# Altium PCB PCB5.PcbDoc (part 1 of 2)
Units mm, origin at the board's own origin, x right, y up, seen from the top; angles counter-clockwise.
Board outline 200 x 100 mm, 2 copper layers (Top Layer, Bottom Layer); 155 components, 119 nets, 507 pads, 129 vias.
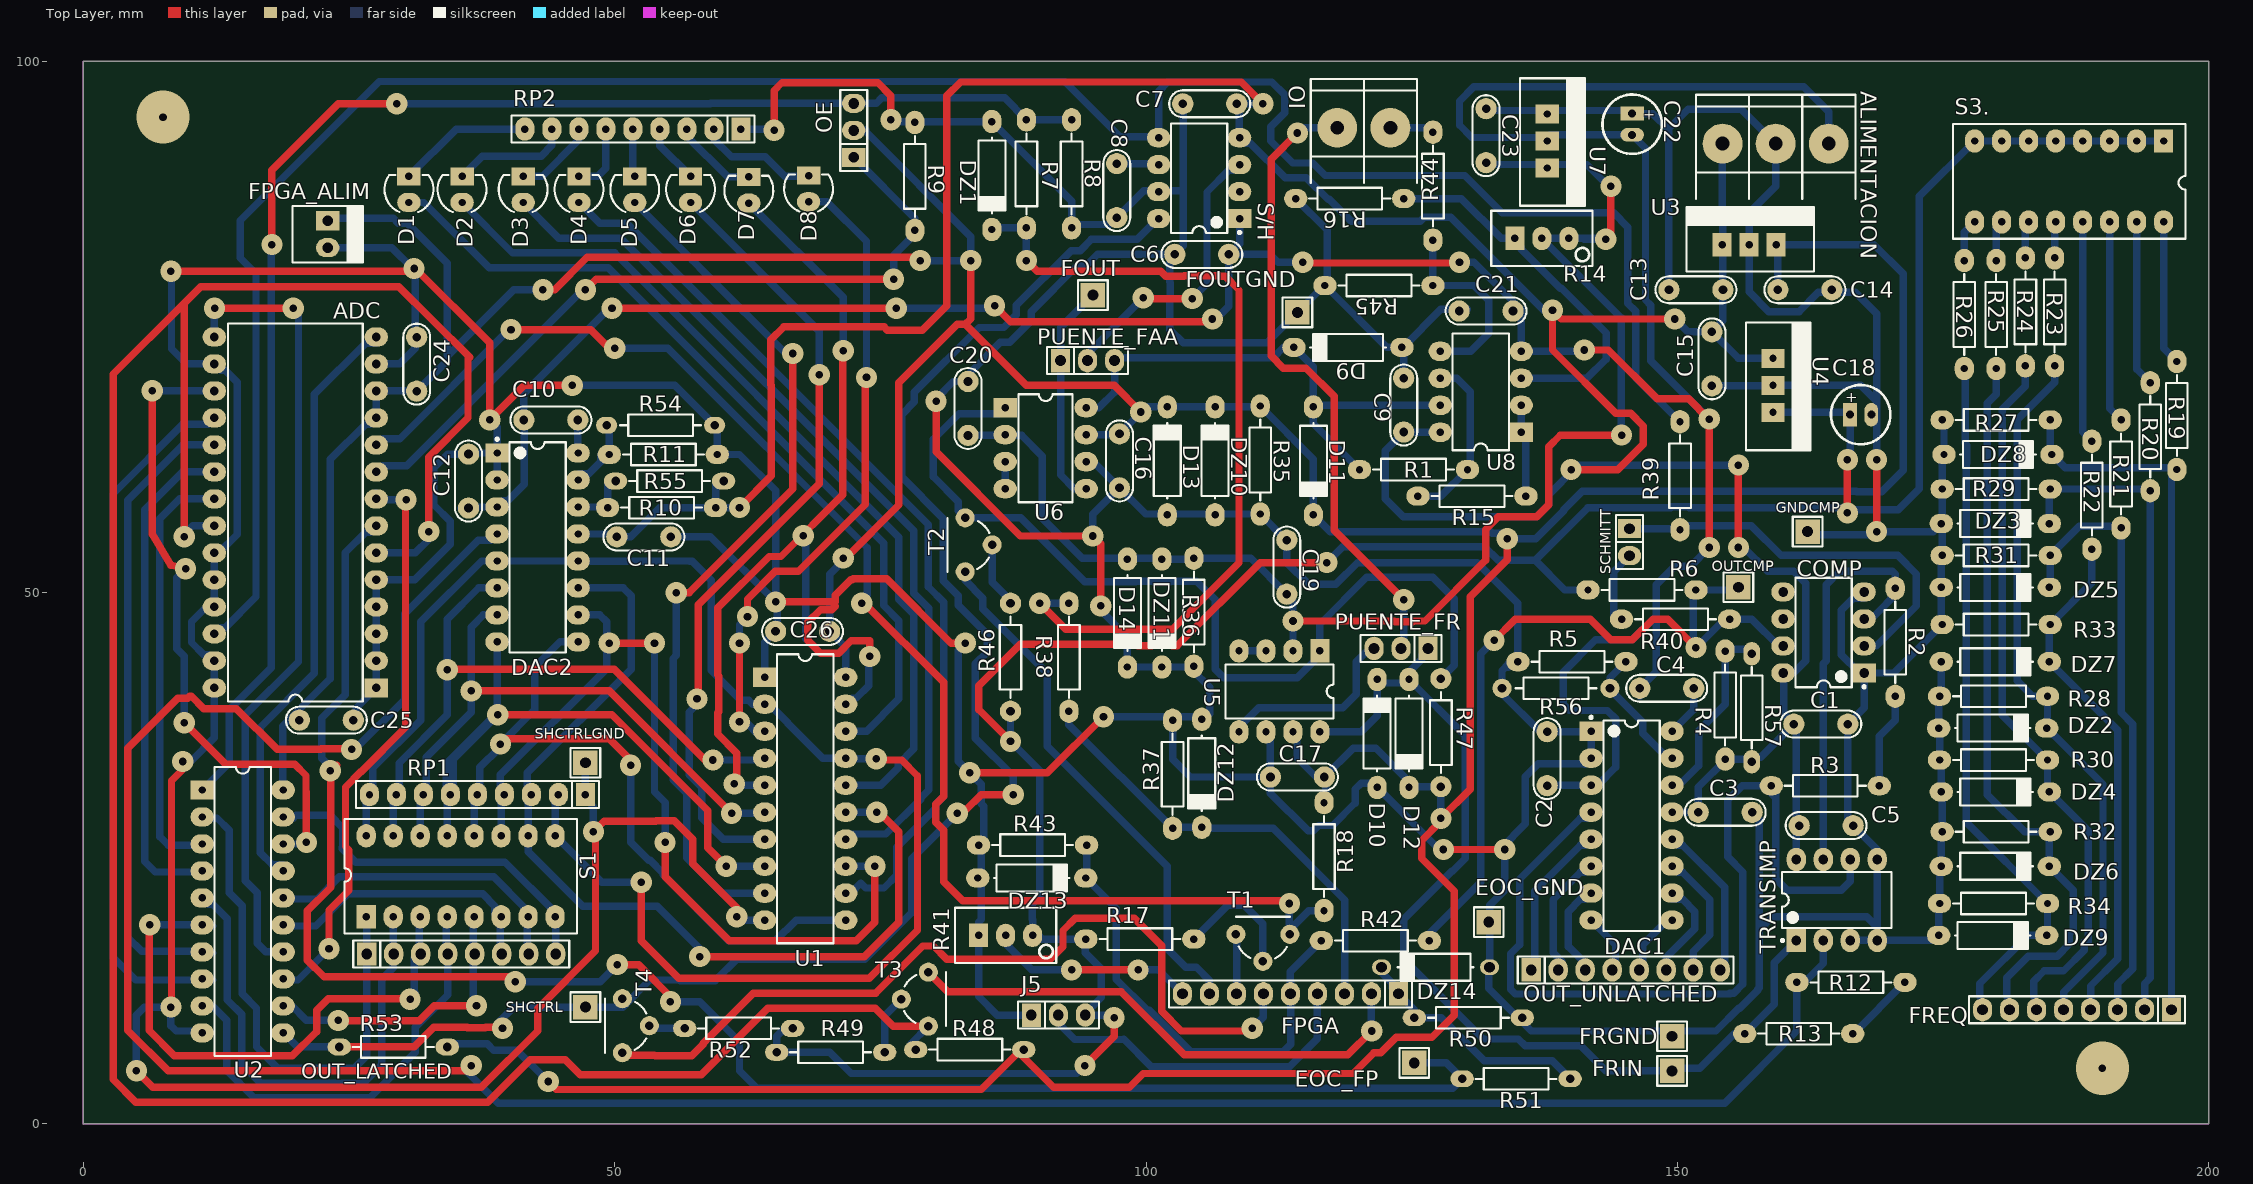
[diagram p0: Top Layer view]
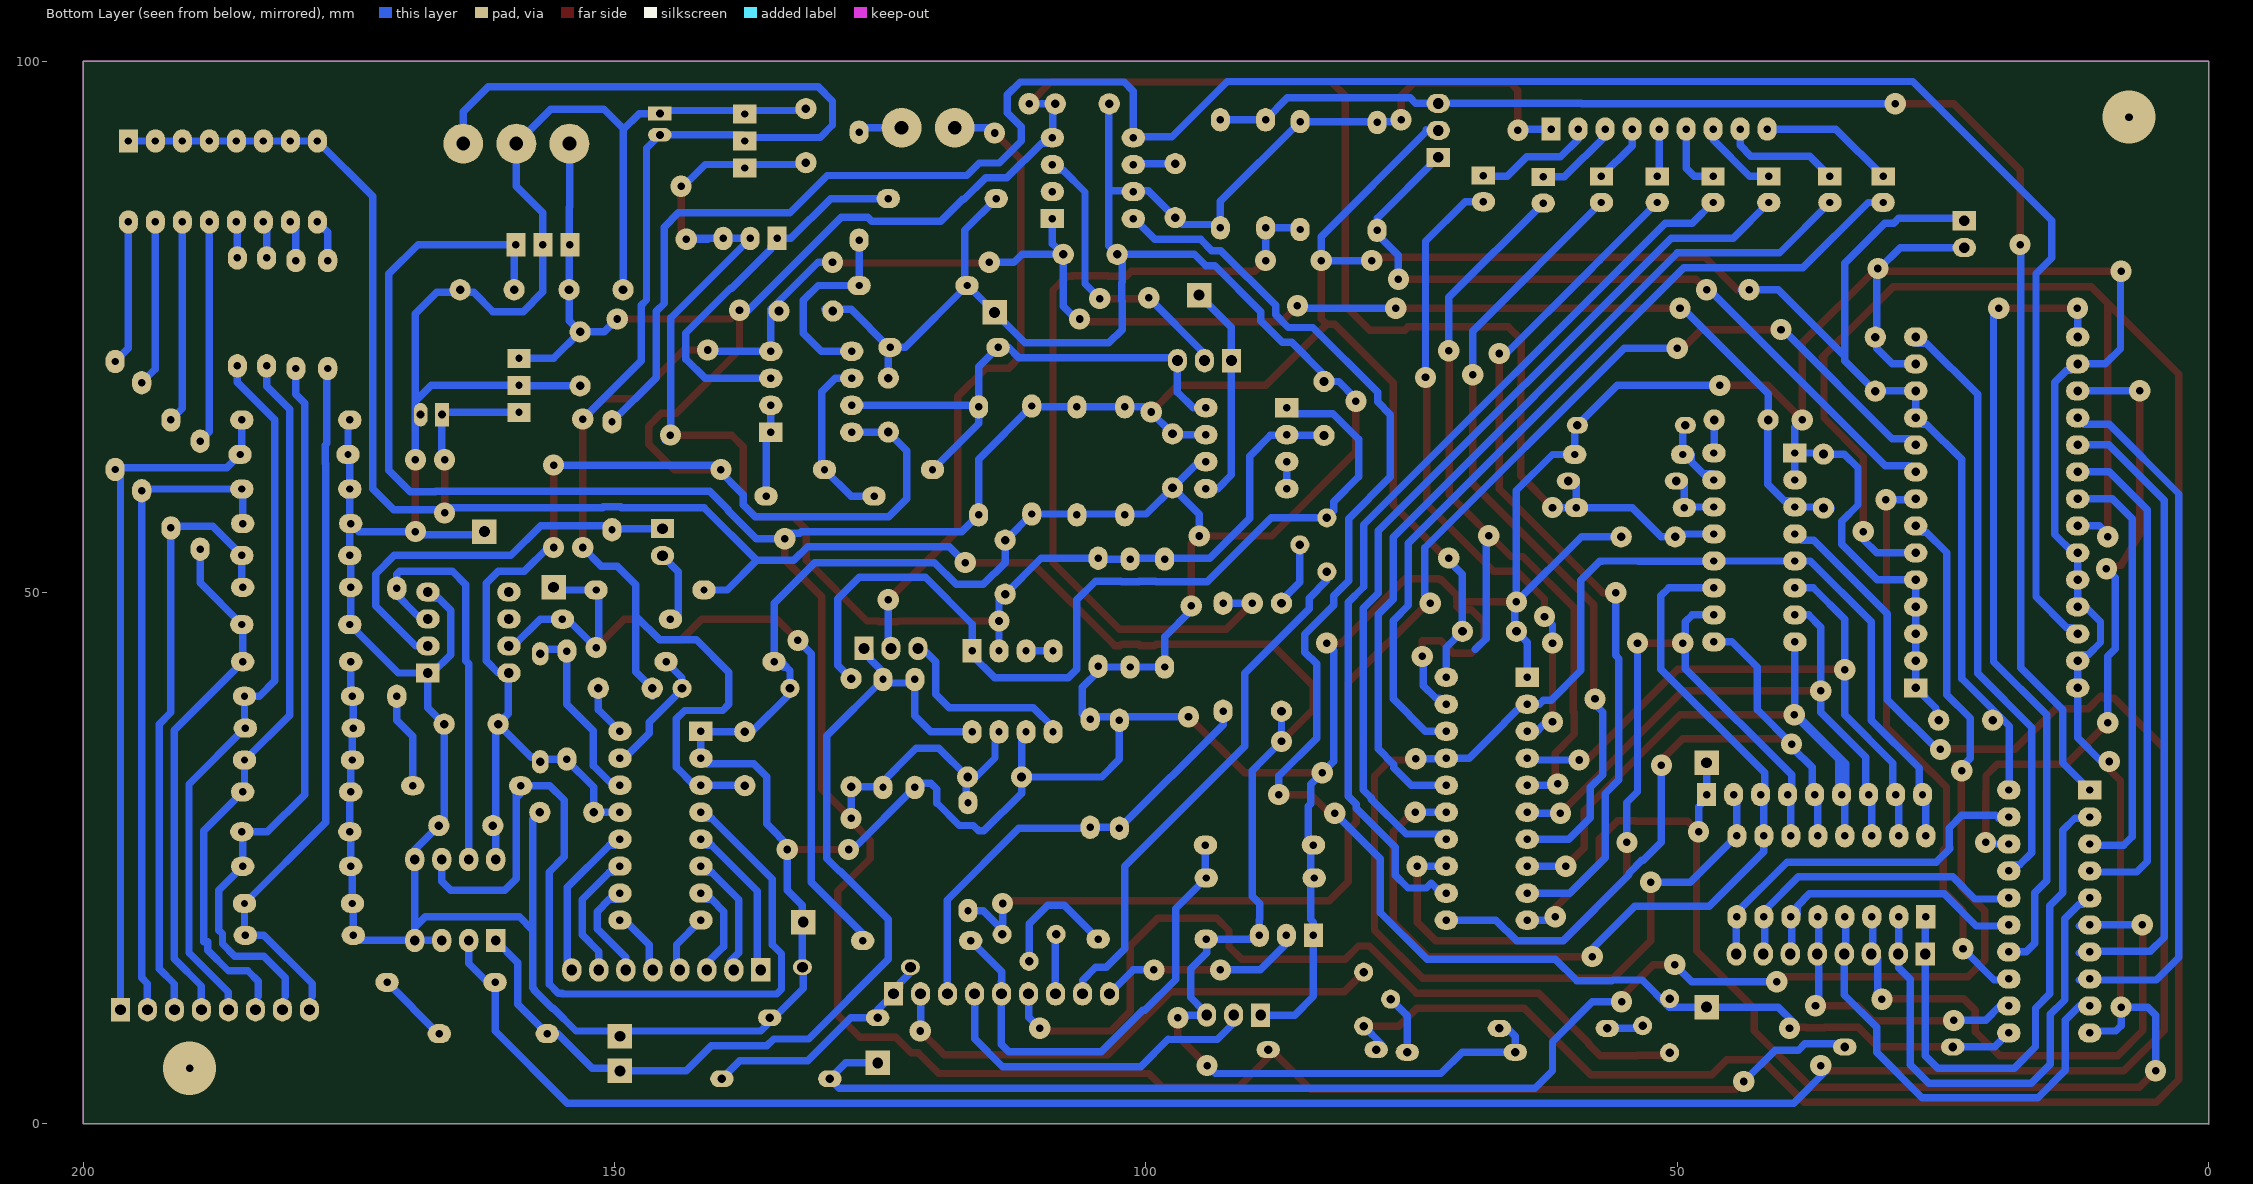
[diagram p1: Bottom Layer view, seen from below]

## Layer stack, top to bottom
Top Solder: solder mask 0.0102, Solder Resist, Dk 3.5
Top Layer: signal copper 0.0356
Dielectric 1: dielectric 0.32, FR-4, Dk 4.8
Bottom Layer: signal copper 0.0356
Bottom Solder: solder mask 0.0102, Solder Resist, Dk 3.5

## Board outline
0,0 0,100 200,100 200,0 0,0

## Design rules (kind name [scope] priority, off if disabled: settings)
Clearance [All] p1: gap=0.7
PolygonConnect [All] p1: connectstyle=Relief reliefconductorwidth=0.254 reliefentries=4 polygonreliefangle="90 Angle" airgapwidth=0.254
RoutingVias [All] p1: holewidth=0.7 width=1.8 viastyle="Through Hole" minholewidth=0.7 minwidth=1.8 maxholewidth=0.7 maxwidth=2
SolderMaskExpansion [All] p1: expansion=0.102
Width [All] p1: maxlimit=0.7 minlimit=0.7 preferedwidth=0.7
30 further rules are at their usual default settings.

## Components (designator, comment, footprint, x,y, rotation, side; value= is the part's Value field where it differs from the comment)
ADC "ADC0808CCN" DIP28 27.573,41.04 r180 top
ALIMENTACION "BORNERA 3" BORNERA3 159.25,92.25 r270 top
C1 "100n" CAP200 163.5,37.63 r0 top
C2 "100n" CAP200 137.75,34.38 r270 top
C3 "100n" CAP200 154.5,29.33 r180 top
C4 "10n" CAP200 149,41 r0 top
C5 "100n" CAP200 164,28.08 r0 top
C6 "100n" CAP200 105.25,81.83 r180 top
C7 "100n" CAP200 106,96 r180 top
C8 "10n" CAP200 97.25,87.83 r270 top
C9 "CAP" CAP200 124.25,67.65 r90 top
C10 "10n" CAP200 44,66.25 r180 top
C11 "100n" CAP200 52.75,55.25 r180 top
C12 "100n" CAP200 36.25,60.5 r270 top
C13 "330n" CAP200 151.75,78.5 r180 top
C14 "100n" CAP200 162,78.5 r0 top
C15 "100n" CAP200 153.25,72 r270 top
C16 "100n" CAP200 97.5,62.4 r270 top
C17 "100n" CAP200 114.25,32.65 r0 top
C18 "10u" CAP100RP 167.25,66.75 r0 top
C19 "100n" CAP200 113.25,52.4 r90 top
C20 "100n" CAP200 83.25,67.33 r90 top
C21 "CAP" CAP200 132,76.5 r180 top
C22 "2.2u" CAP100RP 145.75,94.08 r270 top
C23 "1u" CAP200 132,93 r90 top
C24 "100n" CAP200 31.373,71.5 r90 top
C25 "CAP" CAP200 22.873,38 r180 top
C26 "CAP" CAP200 67.683,46.357 r180 top
COMP "LM311N" N08E#1 163.76,46.25 r180 top
D1 "LED" LED3 30.643,87.933 r90 top
D2 "LED" LED3 35.643,87.933 r90 top
D3 "LED" LED3 41.393,87.933 r90 top
D4 "LED" LED3 46.643,87.933 r90 top
D5 "LED" LED3 51.893,87.933 r90 top
D6 "LED" LED3 57.143,87.933 r90 top
D7 "LED" LED3 62.623,87.873 r90 top
D8 "LED" LED3 68.25,88 r90 top
D9 "DIODO" DO41#1 119,73.08 r180 top
D10 "DIODO" DO41#1 121.75,36.75 r90 top
D11 "DIODO" DO41#1 115.75,62.4 r270 top
D12 "DIODO" DO41#1 124.75,36.75 r270 top
D13 "DIODO" DO41#1 102,62.4 r90 top
D14 "DIODO" DO41#1 98.25,48.08 r270 top
DAC1 "DAC0800LCN" N16E 145.69,28.07 r0 top
DAC2 "DAC0800LCN" N16E 42.75,54.25 r0 top
DZ1 "3.3V" DO41#1 85.5,89.25 r270 top
DZ2 "3.6V" DO41#1 179.67,37.25 r0 top
DZ3 "3.6V" DO41#1 179.92,56.5 r0 top
DZ4 "3.6V" DO41#1 179.92,31.25 r0 top
DZ5 "3.6V" DO41#1 179.92,50.5 r0 top
DZ6 "3.6V" DO41#1 179.92,24.25 r0 top
DZ7 "3.6V" DO41#1 179.92,43.5 r0 top
DZ8 "3.6V" DO41#1 180.17,63 r0 top
DZ9 "3.6V" DO41#1 179.67,17.75 r0 top
DZ10 "5.6V" DO41#1 106.5,62.4 r90 top
DZ11 "5.6V" DO41#1 101.5,48.08 r270 top
DZ12 "3.6V" DO41#1 105.25,33 r270 top
DZ13 "3.6V" DO41#1 89.25,23.15 r0 top
DZ14 "DIODO ZENER" DO41#2 127.25,14.75 r180 top
EOC_FP "TP" TPTH 125.25,5.75 r0 top
EOC_GND "TP" TPTH 132.25,19 r0 top
FOUT "TP" TPTH 95,78 r0 top
FOUTGND "TP" TPTH 114.25,76.368 r0 top
FPGA "CON9" SIP9 123.75,12.25 r180 top
FPGA_ALIM "MOLEX2" MOLEX2 23,85 r270 top
FREQ "CON8" SIP8 196.5,10.75 r180 top
FRGND "TP" TPTH 149.5,8.25 r0 top
FRIN "TP" TPTH 149.5,5 r0 top
GNDCMP "GNDCMP" TPTH 162.25,55.75 r0 top
IO "BORNERA 2" BORNERA2 120.5,93.75 r270 top
J5 "SAR/MOD" JUMPER3 91.75,10.25 r0 top
OE "JUMPER" JUMPER3 72.5,93.5 r90 top
OUT_LATCHED "CON8" SIP8 26.673,16 r0 top
OUT_UNLATCHED "CON8" SIP8 136.25,14.5 r0 top
OUTCMP "TP" TPTH 155.75,50.5 r0 top
PUENTE_FAA "JUMPER" JUMPER3 94.5,71.83 r0 top
PUENTE_FR "JUMPER" JUMPER3 124,44.75 r180 top
R1 "4k7" RES400#1 130.25,61.58 r180 top
R2 "1K5" RES400#1 170.5,50.41 r270 top
R3 "1K" RES400#1 169,31.83 r180 top
R4 "10K" RES400#1 154.5,44.5 r270 top
R5 "10K" RES400#1 145.16,43.5 r180 top
R6 "1K" RES400#1 151.75,50.25 r180 top
R7 "560" RES400#1 88.75,84.33 r90 top
R8 "1K" RES400#1 93,84.33 r90 top
R9 "1K" RES400#1 78.25,94.25 r270 top
R10 "10K" RES400#1 59.5,58 r180 top
R11 "10K" RES400#1 59.66,63 r180 top
R12 "1K" RES400#1 161.25,13.33 r0 top
R13 "1k5" RES400#1 166.5,8.5 r180 top
R14 "10k" "PRESET V" 137.25,83.33 r0 top
R15 "4k7" RES400#1 135.75,59.08 r180 top
R16 "4k7" RES400#1 124.25,87.08 r180 top
R17 "2k2" RES400#1 104.5,17.4 r180 top
R18 "6k8" RES400#1 116.75,20.08 r90 top
R19 "10k" RES400#1 197,71.75 r270 top
R20 "10k" RES400#1 194.5,69.75 r270 top
R21 "10k" RES400#1 191.75,66.25 r270 top
R22 "10k" RES400#1 189,64.25 r270 top
R23 "10k" RES400#1 185.5,81.5 r270 top
R24 "10k" RES400#1 182.75,81.5 r270 top
R25 "10k" RES400#1 180,81.25 r270 top
R26 "10k" RES400#1 177,81.25 r270 top
R27 "22k" RES400#1 174.92,66.25 r0 top
R28 "22k" RES400#1 174.67,40.25 r0 top
R29 "22k" RES400#1 174.92,59.75 r0 top
R30 "22k" RES400#1 174.67,34.25 r0 top
R31 "22k" RES400#1 174.92,53.5 r0 top
R32 "22k" RES400#1 174.92,27.5 r0 top
R33 "22k" RES400#1 174.92,47 r0 top
R34 "22k" RES400#1 174.67,20.75 r0 top
R35 "10k" RES400#1 110.75,57.4 r90 top
R36 "10k" RES400#1 104.5,43.08 r90 top
R37 "20k" RES400#1 102.5,27.83 r90 top
R38 "10k" RES400#1 92.75,49 r270 top
R39 "TBD" RES400#1 150.25,66.08 r270 top
R40 "TBD" RES400#1 144.75,47.5 r0 top
R41 "PRESET" "PRESET V" 86.79,17.75 r0 top
R42 "10K" RES400#1 126.66,17.25 r180 top
R43 "20K" RES400#1 84.25,26.25 r0 top
R44 "4k7" RES400#1 127,93.33 r270 top
R45 "4k7" RES400#1 127,78.9 r180 top
R46 "2k2" RES400#2 87.25,49 r270 top
R47 "6k8" RES400#2 127.75,31.75 r90 top
R48 "6k8" RES400#3 88.5,7 r180 top
R49 "2k2" RES400#4 65.25,6.75 r0 top
R50 "RES" RES400#3 125.25,10 r0 top
R51 "560" RES400#3 129.75,4.25 r0 top
R52 "2K2" RES400#4 66.75,9 r180 top
R53 "6K8" RES400#3 34.25,7.25 r180 top
R54 "10K" RES400#5 59.41,65.75 r180 top
R55 "10K" RES400#3 60.25,60.5 r180 top
R56 "10K" RES400#6 143.66,41 r180 top
R57 "10K" RES400#3 157,44.25 r270 top
RP1 "R-PACK 8+1" RESNET8+1 47.25,31 r180 top
RP2 "R-PACK 8+1" RESNET8+1 61.873,93.623 r180 top
S1 "SW-DIP8" DIP-16-KEY 26.623,19.5 r0 top
S3. "SW-DIP8" DIP-16-KEY 195.75,92.5 r180 top
S/H "LF398N" N08E#2 105,89 r180 top
SCHMITT "JUMPER" JUMPER2 145.5,54.75 r270 top
SHCTRL "TP" TPTH 47.25,11 r0 top
SHCTRLGND "TP" TPTH 47.25,34 r90 top
T1 "TRANSISTOR NPN" TO92 111,16.58 r0 top
T2 "TRANSISTOR NPN" TO92 84.25,54.5 r90 top
T3 "TRANSISTOR NPN" TO92 78.25,11.75 r270 top
T4 "TRANSISTOR NPN" TO92 52,9.25 r90 top
TRANSIMP "LM358N" N08E#1 165,21.08 r90 top (schematic designator TRANSIMPEDANCIA)
U1 "SN74LS244N" 738-03 67.933,30.607 r270 top
U2 "MC74HC374N" 738-03 15,20 r270 top
U3 "7805" "TO-220 V" 156.75,82.75 r0 top
U4 "MC33269" "TO-220 V" 159,69.5 r270 top
U5 "MAX297CPA" DIP8 116.37,44.52 r270 top
U6 "MAX297CPA" DIP8 86.75,67.4 r0 top
U7 "7905" "TO-220 V" 137.75,92.5 r270 top
U8 "TL082ACJG" 693-02 131.5,68.9 r90 top

## Footprints (in the part's own frame and the unit in brackets; to place one, negate y for a bottom-side part, rotate by r counter-clockwise, add the part's x,y. Pads: shape width x height; smd on the part's side, far side on the other; paste and mask are expansions set on the pad)
693-02 [mm] "DIP; 8 Leads; Row Spacing 7.62 mm; Pitch 2.54 mm"
  rect 1.8x2.2 hole 0.7: 1(-3.81,-3.81)
  oval 1.8x2.2 hole 0.7: 2(-1.27,-3.81) 3(1.27,-3.81) 4(3.81,-3.81) 5(3.81,3.81) 6(1.27,3.81) 7(-1.27,3.81) 8(-3.81,3.81)
  silkscreen extent -5.5,-2.65 5.5,2.65
738-03 [mm] "DIP; 20 Leads; Row Spacing 7.62 mm; Pitch 2.54 mm"
  rect 1.8x2.2 hole 0.7: 1(-11.43,-3.81)
  oval 1.8x2.2 hole 0.7: 2(-8.89,-3.81) 3(-6.35,-3.81) 4(-3.81,-3.81) 5(-1.27,-3.81) 6(1.27,-3.81) 7(3.81,-3.81) 8(6.35,-3.81) 9(8.89,-3.81) 10(11.43,-3.81) 11(11.43,3.81) 12(8.89,3.81) 13(6.35,3.81) 14(3.81,3.81) 15(1.27,3.81) 16(-1.27,3.81) 17(-3.81,3.81) 18(-6.35,3.81) 19(-8.89,3.81) 20(-11.43,3.81)
  silkscreen extent -13.6,-2.65 13.6,2.65
BORNERA2 [mm] "Bornera con Tornillos 5mm separación"
  round 3.75 hole 1.3: 1(0,2.5) 2(0,-2.5)
  silkscreen extent -4.6,-5 5.2,5, body extent -3.76,-4.89 3.94,5.61, height 10
BORNERA3 [mm] "Bornera con Tornillos 5mm separación"
  round 3.75 hole 1.3: 1(0,5) 2(0,0) 3(0,-5)
  silkscreen extent -4.6,-7.5 5.2,7.5, body extent -3.76,-7.39 3.94,8.11, height 10.05
CAP100RP [mm] "Body diameter 5mm"
  rect 1.3x2.2 hole 0.762: 1(-1,0)
  oval 1.3x2.2 hole 0.762: 2(1,0)
  silkscreen extent -2.79,-2.79 2.79,2.79, body extent -2.53,-2.51 2.53,2.54, height 11.53
CAP200 [mm]
  round 2 hole 0.813: 1(-2.54,0) 2(2.54,0)
  silkscreen extent -3.81,-1.27 3.81,1.27, body extent -2.79,-1.17 2.79,1.12, height 6.24
DIP8 [mm]
  rect 2.2x1.8 hole 0.7: 1(0,0)
  oval 2.2x1.8 hole 0.7: 2(0,-2.54) 3(0,-5.08) 4(0,-7.62) 5(7.62,-7.62) 6(7.62,-5.08) 7(7.62,-2.54) 8(7.62,0)
  silkscreen extent 1.27,-8.89 6.35,1.27, body extent -0.06,-9.21 7.7,1.59, height 4.5
DIP28 [mm]
  rect 2.2x1.8 hole 0.813: 1(0,0)
  oval 2.2x1.8 hole 0.813: 2(0,-2.54) 3(0,-5.08) 4(0,-7.62) 5(0,-10.16) 6(0,-12.7) 7(0,-15.24) 8(0,-17.78) 9(0,-20.32) 10(0,-22.86) 11(0,-25.4) 12(0,-27.94) 13(0,-30.48) 14(0,-33.02) 15(15.24,-33.02) 16(15.24,-30.48) 17(15.24,-27.94) 18(15.24,-25.4) 19(15.24,-22.86) 20(15.24,-20.32) 21(15.24,-17.78) 22(15.24,-15.24) 23(15.24,-12.7) 24(15.24,-10.16) 25(15.24,-7.62) 26(15.24,-5.08) 27(15.24,-2.54) 28(15.24,0)
  silkscreen extent 1.27,-34.29 13.97,1.27, body extent -0.19,-34.54 15.43,1.47, height 4.66
DIP-16-KEY [mm] "DIP; 16 Leads; Row Spacing 7.62 mm; Pitch 2.54 mm"
  rect 1.8x2.2 hole 0.7: 1(0,0)
  oval 1.8x2.2 hole 0.7: 2(2.54,0) 3(5.08,0) 4(7.62,0) 5(10.16,0) 6(12.7,0) 7(15.24,0) 8(17.78,0) 9(17.78,7.62) 10(15.24,7.62) 11(12.7,7.62) 12(10.16,7.62) 13(7.62,7.62) 14(5.08,7.62) 15(2.54,7.62) 16(0,7.62)
  silkscreen extent -2.05,-1.59 19.83,9.2
DO41#1 [mm]
  oval 2.2x1.8 hole 0.7: 1(-5.08,0) 2(5.08,0)
  silkscreen extent -3.56,-1.27 3.56,1.27, body extent -5.46,-1.19 5.46,1.37, height 2.03
DO41#2 [mm]
  oval 1.8x1.5 hole 1.016: 1(-5.08,0) 2(5.08,0)
  silkscreen extent -3.56,-1.27 3.56,1.27, body extent -5.46,-1.19 5.46,1.37, height 2.03
JUMPER2 [mm]
  rect 1.8x2.2 hole 1.016: 1(-1.27,0)
  oval 1.8x2.2 hole 1.016: 2(1.27,0)
  silkscreen extent -2.54,-1.27 2.54,1.27, body extent -2.46,-1.27 2.54,1.27, height 9.5
JUMPER3 [mm]
  rect 1.8x2.2 hole 1.016: 1(-2.54,0)
  oval 1.8x2.2 hole 1.016: 2(0,0) 3(2.54,0)
  silkscreen extent -3.81,-1.27 3.81,1.27, body extent -3.81,-1.3 3.81,1.27, height 16.15
LED3 [mm]
  oval 1.8x2.2 hole 0.7: 1(-1.219,0)
  rect 1.7x2.2 hole 0.7: 2(1.245,0)
  silkscreen extent -2.13,-2.3 1.36,2.3, body extent -1.65,-1.63 1.65,1.66, height 0.49
MOLEX2 [mm]
  rect 1.8x2.2 hole 1.016: 1(0,0)
  oval 1.8x2.2 hole 1.016: 2(2.54,0)
  silkscreen extent -1.4,-3.3 3.94,3.3, body extent -1.27,-3.18 3.81,3.18, height 10.74
N08E#1 [mm] "DIP, 8-Leads, Row Spacing 7.62mm, Pitch 2.54mm, Body 9.91x6.35mm"
  rect 2.2x1.8 hole 0.9: 1(-3.81,3.81)
  oval 2.2x1.8 hole 0.9: 2(-3.81,1.27) 3(-3.81,-1.27) 4(-3.81,-3.81) 5(3.81,-3.81) 6(3.81,-1.27) 7(3.81,1.27) 8(3.81,3.81)
  silkscreen extent -3.94,-5.15 2.65,5.23, body extent -3.6,-5.15 3.6,5.15, height 5.34
N08E#2 [mm] "DIP, 8-Leads, Row Spacing 7.62mm, Pitch 2.54mm, Body 9.91x6.35mm"
  rect 2.2x1.8 hole 0.7: 1(-3.81,3.81)
  oval 2.2x1.8 hole 0.7: 2(-3.81,1.27) 3(-3.81,-1.27) 4(-3.81,-3.81) 5(3.81,-3.81) 6(3.81,-1.27) 7(3.81,1.27) 8(3.81,3.81)
  silkscreen extent -3.94,-5.15 2.65,5.23, body extent -3.6,-5.15 3.6,5.15, height 5.34
N16E [mm] "DIP, 16-Leads, Row Spacing 7.62mm, Pitch 2.54mm, Body 19.3x6.35mm"
  rect 2.2x1.8 hole 0.7: 1(-3.81,8.89)
  oval 2.2x1.8 hole 0.7: 2(-3.81,6.35) 3(-3.81,3.81) 4(-3.81,1.27) 5(-3.81,-1.27) 6(-3.81,-3.81) 7(-3.81,-6.35) 8(-3.81,-8.89) 9(3.81,-8.89) 10(3.81,-6.35) 11(3.81,-3.81) 12(3.81,-1.27) 13(3.81,1.27) 14(3.81,3.81) 15(3.81,6.35) 16(3.81,8.89)
  silkscreen extent -3.93,-9.9 2.65,10.31, body extent -3.3,-9.9 3.3,9.9, height 4.32
"PRESET V" [mm]
  rect 1.8x2.2 hole 0.7: 1(-2.54,0)
  oval 1.8x2.2 hole 0.7: 2(0,0) 3(2.54,0)
  silkscreen extent -4.76,-2.6 4.76,2.6, body extent -4.7,-2.42 4.83,2.42, height 11.55
RES400#1 [mm]
  oval 2.2x1.8 hole 0.7: 1(0,0) 2(10.16,0)
  silkscreen extent 1.27,-1.02 8.89,1.02, body extent -0.3,-1.14 10.46,1.17, height 2.43
RES400#2 [mm]
  round 2 hole 0.813: 1(0,0) 2(10.16,0)
  silkscreen extent 1.27,-1.02 8.89,1.02, body extent -0.3,-1.14 10.46,1.17, height 2.43
RES400#3 [mm]
  oval 2.2x1.575 hole 0.813: 1(0,0) 2(10.16,0)
  silkscreen extent 1.27,-1.02 8.89,1.02, body extent -0.3,-1.14 10.46,1.17, height 2.43
RES400#4 [mm]
  oval 2.2x1.6 hole 0.813: 1(0,0) 2(10.16,0)
  silkscreen extent 1.27,-1.02 8.89,1.02, body extent -0.3,-1.14 10.46,1.17, height 2.43
RES400#5 [mm]
  oval 2x1.575 hole 0.813: 1(0,0) 2(10.16,0)
  silkscreen extent 1.27,-1.02 8.89,1.02, body extent -0.3,-1.14 10.46,1.17, height 2.43
RES400#6 [mm]
  round 1.8 hole 0.813: 1(0,0) 2(10.16,0)
  silkscreen extent 1.27,-1.02 8.89,1.02, body extent -0.3,-1.14 10.46,1.17, height 2.43
RESNET8+1 [mm]
  rect 1.8x2.2 hole 0.7: 1(0,0)
  oval 1.8x2.2 hole 0.7: 2(2.54,0) 3(5.08,0) 4(7.62,0) 5(10.16,0) 6(12.7,0) 7(15.24,0) 8(17.78,0) 9(20.32,0)
  silkscreen extent -1.27,-1.27 21.59,1.27, body extent -1.09,-0.64 21.41,0.62, height 5.3
SIP8 [mm]
  rect 1.8x2.2 hole 1.016: 1(0,0)
  oval 1.8x2.2 hole 1.016: 2(2.54,0) 3(5.08,0) 4(7.62,0) 5(10.16,0) 6(12.7,0) 7(15.24,0) 8(17.78,0)
  silkscreen extent -1.27,-1.27 19.05,1.27, body extent -1.27,-1.27 19.05,1.27, height 8.38
SIP9 [mm]
  rect 1.8x2.2 hole 1.016: 1(0,0)
  oval 1.8x2.2 hole 1.016: 2(2.54,0) 3(5.08,0) 4(7.62,0) 5(10.16,0) 6(12.7,0) 7(15.24,0) 8(17.78,0) 9(20.32,0)
  silkscreen extent -1.27,-1.27 21.59,1.27, body extent -1.27,-1.3 21.59,1.24, height 8.38
TO92 [mm]
  round 1.8 hole 0.813: 1(0,-1.27) 2(2.54,1.27) 3(-2.54,1.27)
  silkscreen extent -2.54,-1 2.54,2.92, body extent -2.79,-1.55 2.79,2.79, height 8
"TO-220 V" [mm]
  rect 1.8x2.2 hole 0.7: 1(-2.54,0) 2(0,0) 3(2.54,0)
  silkscreen extent -5.9,-2.54 6.1,3.54, body extent -5,-2 5,3, height 18
TPTH [mm]
  rect 2.3x2.3 hole 1.016: 1(0,0)
  silkscreen extent -1.4,-1.4 1.4,1.4, body extent -1.27,-1.27 1.27,1.27, height 6.04

## Part data
ADC: "28 pin 8-bit Microprocessor Compatible A/D Converters With 8-Channel Multiplexer 13 per tube"
C1 C2 C3 C4 C5 C6 C7 C8 C10 C11 C12 C13 C14 C15 C16 C17 C19 C20 C23 C24: library part CAP
C18 C22: library part CAPPOL
COMP: "Voltage Comparator, 8-pin MDIP"
DAC1 DAC2: "8-Bit D/A Converter, 16-pin MDIP"
DZ1 DZ2 DZ3 DZ4 DZ5 DZ6 DZ7 DZ8 DZ9 DZ10 DZ11 DZ12 DZ13: library part "DIODO ZENER"
GNDCMP: library part TP
J5 OE PUENTE_FAA PUENTE_FR: library part JUMPER3
R1 R2 R3 R4 R5 R6 R7 R8 R9 R10 R11 R12 R13 R15 R16 R17 R18 R19 R20 R21 R22 R23 R24 R25 R26 R27 R28 R29 R30 R31 R32 R33 R34 R35 R36 R37 R38 R39 R40 R42 R43 R44 R45 R46 R47 R48 R49 R51 R52 R53 R54 R55 R56 R57: library part RES
R14: library part PRESET
S1 S3.: "4009 Series DIP Switch, Raised actuator"
S/H: "Monolithic Sample and Hold Circuits, 8-pin MDIP"
TRANSIMP: "Low Power Dual Operational Amplifier, 8-pin MDIP"
U1: "Octal Buffer/Line Driver with 3-State Outputs"
U2: "Octal 3-State Non-Inverting D-Type Flip-Flop"
U3 U4: library part 78XX, "REGULDOR POSITIVO"
U5 U6: "Active Filter Single SW-CAP Low Pass 8th Order 50kHz 8-Pin PDIP N"
U7: library part 79XX, "REGULADOR NEGATIVO"
U8: "JFET-Input Operational Amplifier"

## Via types
v1: diameter 2, hole 0.711, Top Layer to Bottom Layer, 127 vias
v2: diameter 5, hole 0.711, Top Layer to Bottom Layer, 2 vias

## Nets (pads, with @x,y where several pads share a name; then routed paths per layer and width w, separated by ;. In a path a pad name is that pad's centre, name@x,y a point inside that pad or via, vN(x,y) a via of type N, cw(c..) or ccw(c..) an arc to the next point about the centre after c; other vN are vias at no path point)
B0: DAC2.5 DAC2.12 RP1.2 RP1.9 S1.9 S1.16 U1.2 U1.17 | length 149.1
  Top Layer w0.7: v1(52.5,22.75) 52.5,17.25 56.05,13.7 73.95,13.7 78.5,18.25 78.5,32.75 77,34.25 74.75,34.25 v1(74.623,34.377)
  Bottom Layer w0.7: RP1.9@26.533,30.37 RP1.9@26.533,31 ; S1.16@26.623,27.12 26.623,30.93 27.25,31.557 27.25,33.5 31.75,38 31.75,47.25 37.48,52.98 DAC2.5@38.94,52.98 DAC2.12@46.56,52.98 46.59,52.95 53.682,52.95 53.712,52.98 57.034,52.98 57.064,52.95 57.3,52.95 59.073,51.177 59.073,42.677 61.866,39.884 62.599,39.884 62.986,39.497 U1.2@64.123,39.497 64.541,39.497 66.273,37.765 66.273,37.727 69.583,34.417 U1.17@71.743,34.417 71.783,34.377 v1(74.623,34.377) ; RP1.2@44.313,30.37 RP1.2@44.313,31 ; RP1.2@44.403,30.93 S1.9@44.403,27.12 48.773,22.75 v1(52.5,22.75)
B1: DAC2.11 RP1.3 S1.10 U1.15 | length 89.6
  Top Layer w0.7: v1(58,15.75) 73.5,15.75 76.75,19 76.75,27.5 74.913,29.337 v1(74.663,29.337)
  Bottom Layer w0.7: RP1.3@41.773,30.37 RP1.3@41.773,31 ; RP1.3@41.863,30.93 S1.10@41.863,27.12 41.863,25.637 47,20.5 54,20.5 58,16.5 v1(58,15.75) ; RP1.3@42.383,31 41.793,31 41.793,33.043 51.55,42.8 51.55,49.7 50.81,50.44 DAC2.11@46.56,50.44 ; U1.15@71.743,29.337 v1(74.663,29.337)
B2: DAC2.10 RP1.4 S1.11 U1.13 | length 85.7
  Top Layer w0.7: v1(49.5,45.25) 49.75,45 50,45.25 v1(53.75,45.25) ; v1(54.75,26.5) 54.75,23.25 60.773,17.227 72.751,17.227 74.493,18.969 v1(74.493,24.257)
  Bottom Layer w0.7: RP1.4@39.233,30.37 RP1.4@39.233,31 ; RP1.4@39.253,31 39.253,32.854 49.25,42.851 49.25,47.25 48.6,47.9 DAC2.10@46.56,47.9 ; S1.11@39.323,27.12 RP1.4@39.323,30.93 ; v1(53.75,45.25) 53.75,31.25 54.75,30.25 v1(54.75,26.5) ; U1.13@71.743,24.257 v1(74.493,24.257)
B3: DAC2.9 RP1.5 S1.12 U1.11 | length 70.5
  Top Layer w0.7: v1(39.25,35.75) 39.75,36.25 49.5,36.25 52,33.75 v1(51.5,33.75)
  Bottom Layer w0.7: RP1.5@36.693,30.37 RP1.5@36.693,31 ; RP1.5@36.713,31 37.303,31 37.303,33.553 v1@39.125,35.375 ; S1.12@36.783,27.12 RP1.5@36.783,30.93 ; v1(39.25,35.75) 42.5,39 42.5,43 44.86,45.36 DAC2.9@46.56,45.36 ; v1(51.5,33.75) 51.5,26.5 53.2,24.8 53.349,24.8 54.55,23.599 54.55,23.45 60.75,17.25 63.092,17.25 63.115,17.227 65.131,17.227 67.081,19.177 U1.11@71.743,19.177
B4: DAC2.8 RP1.6 S1.13 U1.8 | length 61.5
  Top Layer w0.7: v1(39,38.5) 49.75,38.5 58.75,29.5 58.75,26 v1(60.5,24.25)
  Bottom Layer w0.7: RP1.6@34.173,31 34.173,33.923 38.94,38.69 38.94,44.36 ; S1.13@34.243,27.12 RP1.6@34.243,30.93 ; RP1.6@34.8,31 34.8,34.3 v1(39,38.5) ; v1@60.507,24.257 U1.8@64.123,24.257
B5: DAC2.7 RP1.7 S1.14 U1.6 | length 56.7
  Top Layer w0.7: v1(36.5,40.75) 49.5,40.75 v1(61,29.25)
  Bottom Layer w0.7: RP1.7@31.633,31 31.703,30.93 S1.14@31.703,27.12 ; RP1.7@32.26,31 32.26,34.51 36.5,38.75 v1(36.5,40.75) 36.5,46.75 37.65,47.9 DAC2.7@38.94,47.9 ; v1(61,29.25) 63.71,29.25 U1.6@63.96,29.5
B6: DAC2.6 RP1.8 S1.15 U1.4 | length 61.7
  Top Layer w0.7: v1(34.25,42.75) 34.3,42.8 49.95,42.8 58.583,34.167 58.666,34.25 v1(59.25,34.25)
  Bottom Layer w0.7: RP1.8@29.093,31 29.163,30.93 S1.15@29.163,27.12 ; RP1.8@29.72,31 29.72,33.97 34.25,38.5 v1(34.25,42.75) 34.25,47.5 37.19,50.44 DAC2.6@38.94,50.44 ; v1(59.25,34.25) 64.04,34.25 U1.4@64.123,34.167
CLK_9FS: FPGA.7 T1.3 | length 5.6
  Bottom Layer w0.7: FPGA.7@108.55,11.83 108.55,12.08 T1.3@108.55,17.47
CLK_DAC: ADC.10 R18.1 T1.2 | length 136.3
  Top Layer w0.7: v1(40.25,74.75) 47.75,74.75 49.25,73.25 v1@50.25,73.25 ; v1(73.25,49) 73.5,49 80.95,41.55 80.95,30.849 80.2,30.099 80.2,28.401 80.95,27.651 80.95,22.8 82.75,21 113,21 v1@113.625,20.375
  Bottom Layer w0.7: ADC.10@27.573,63.9 28.163,64.49 29.802,64.49 39.812,74.5 v1@40.75,74.5 ; v1(50,73) 55,73 73.75,54.25 73.75,49.75 73.25,49.25 v1(73.25,49) ; v1(113.5,20.75) 113.5,17.89 T1.2@113.54,17.85 113.54,18.29 115.33,20.08 R18.1@116.75,20.08
CLK_FILTRO: FPGA.8 T2.3 | length 50.2
  Bottom Layer w0.7: T2.3@82.98,51.96 82.98,51.149 84.65,49.479 84.65,48.479 90.7,42.429 90.7,35.55 102,24.25 102,16.508 103.758,14.75 104.75,14.75 105.97,13.53 FPGA.8@105.97,12.25 ; FPGA.8@106.01,11.83 FPGA.8@106.01,12.25
CONTROL_FPGA: FPGA.6 T4.3 | length 78.8
  Top Layer w0.7: T4.3@50.73,6.46 53.75,6.46 53.797,6.413 57.261,6.413 58.337,7.489 58.337,7.587 63.05,12.3 74.55,12.3 79,16.75 80,16.75 81.25,15.5 91,15.5 92.19,16.69 92.19,18.208 93.332,19.35 98.9,19.35 101.48,16.77 101.48,10.601 103.331,8.75 109.75,8.75 v1(110,9)
  Bottom Layer w0.7: v1@109.75,8.75 v1(110,9) 111.05,10.05 FPGA.6@111.05,12.25
EOC_FPGA: ADC.7 EOC_FP.1 R51.1 | length 167.7
  Top Layer w0.7: v1(23.25,33.25) v1@23.35,33.25 ; v1@23.85,33.75 23.273,33.173 23.273,22.253 21.073,20.053 21.073,15.427 22.65,13.85 40.186,13.85 v1(40.643,13.393) ; v1(50.25,15) 52.25,15 v1@55.625,11.625
  Bottom Layer w0.7: v1(23.25,33.25) 23.25,33.601 22.45,34.401 22.45,38.2 24.65,40.4 24.65,53.775 26.565,55.69 26.983,55.69 ADC.7@27.573,56.28 ; v1(40.643,13.393) 48.643,13.393 v1(50.25,15) ; v1(55.25,11.5) 58,11.5 61.75,7.75 61.75,5 63.4,3.35 128.85,3.35 R51.1@129.75,4.25 128.25,5.75 EOC_FP.1@125.25,5.75
FPGA_OE: DZ1.2 R7.1 R38.1 | length 77.6
  Top Layer w0.7: v1(88.75,81.25) 89.75,80.25 101.391,80.25 101.861,79.78 103.559,79.78 103.579,79.8 106.921,79.8 106.941,79.78 107.449,79.78 108.75,78.479 108.75,52.81 102.49,46.55 92.45,46.55 v1(90,49)
  Bottom Layer w0.7: DZ1.2@85.66,84.33 R7.1@88.75,84.33 v1@88.75,81.5 ; v1@90.25,49 R38.1@92.75,49
FR_IN: D10.2 D12.1 FRIN.1 PUENTE_FR.1 R13.2 TRANSIMP.1 U5.8 | length 95.3
  Bottom Layer w0.7: U5.8@116.37,36.9 120.25,36.9 121.75,38.4 121.75,41.5 D12.1@124.75,41.5 ; PUENTE_FR.1@126.54,44.75 125.95,44.16 125.95,43.742 124.808,42.6 124.75,42.6 D12.1@124.75,41.83 130.04,36.54 130.04,24.981 128.839,23.78 128.78,23.78 124.25,19.25 124.25,15.5 131.75,8 135.02,8 135.67,7.35 140.9,7.35 143.25,5 FRIN.1@149.5,5 ; FRIN.1@149.5,5.25 152.112,5.25 155.362,8.5 R13.2@156.34,8.5 159.1,11.26 159.1,15.18 TRANSIMP.1@161.19,17.27
GND: ADC.1 ADC.2 ADC.3 ADC.4 ADC.5 ADC.13 ADC.16 ADC.23 ADC.24 ADC.25 ADC.27 ADC.28 ALIMENTACION.2 C1.2 C2.1 C3.1 C5.2 C6.2 C7.2 C8.2 C9.2 C11.1 C12.1 C13.2 C14.2 C15.2 C16.2 C17.1 C18.2 C19.2 C20.2 C21.2 C22.1 C23.2 C24.2 C25.1 C26.2 COMP.1 COMP.4 D9.1 D10.1 D13.1 D14.2 DAC1.1 DAC1.2 DAC2.1 DAC2.2 DZ1.1 DZ2.1 DZ3.1 DZ4.1 DZ5.1 DZ6.1 DZ7.1 DZ8.1 DZ9.1 DZ10.1 DZ11.2 DZ12.1 DZ13.1 DZ14.1 EOC_GND.1 FOUTGND.1 FPGA_ALIM.2 FRGND.1 GNDCMP.1 J5.1 R5.2 R8.1 R9.1 R11.1 R16.2 R27.1 R28.1 R29.1 R30.1 R31.1 R32.1 R33.1 R34.1 R35.1 R36.1 R37.2 R41.1 R43.1 R45.2 R50.2 R54.1 R56.2 RP1.1 RP2.1 S/H.7 SHCTRLGND.1 TRANSIMP.3 TRANSIMP.4 TRANSIMP.5 U1.1 U1.10 U1.19 U2.10 U3.2 U4.2 U5.6 U6.6 U7.1 | length 1094.9
  Top Layer w0.7: v1(5,5) 6.55,3.45 37.45,3.45 42.75,8.75 42.75,10.852 48.2,16.302 48.2,27.2 48,27.4 v1(48,27.5) 49,28.5 53.851,28.5 53.901,28.55 55.599,28.55 57.35,26.799 57.35,24.501 61.5,20.351 v1(61.5,19.5) ; v1(8.25,11) 8.3,11.05 8.3,32.3 9.362,33.362 v1(9.362,34.111) ; v1(8.25,80.25) v1@30.75,80.25 ; v1@31.25,80.5 38.25,73.5 v1(38.25,66.25) 41.5,69.5 v1(46,69.5) ; v1(65,93.5) 65,97.25 65.75,98 74.75,98 76,96.75 v1(76,94.5) ; v1(65.143,49.127) 70.75,49.127 70.75,49.75 72.2,51.2 72.349,51.2 72.449,51.3 75.599,51.3 81.649,45.25 v1(83,45.25) ; 70.75,48.729 70.428,48.407 69.374,48.407 68.173,47.206 68.173,45.508 69.374,44.307 71.072,44.307 72.244,45.479 74,45.479 v1(74,44) ; v1(80.25,68) 80.25,63.25 88.17,55.33 v1(95,55.33) 95.75,54.58 v1(95.75,48.75) ; v1(83.425,33.047) 83.428,33.05 88.349,33.05 88.352,33.047 90.717,33.047 v1(96,38.33) ; v1(127.99,25.83) v1(133.75,25.83) ; v1(168.75,55.75) v1(168.75,62.5)
  Bottom Layer w0.7: v1(5,5) 5,10.25 5.75,11 v1(8.25,11) 8.25,9.25 8.75,8.75 11.01,8.75 U2.10@11.19,8.57 ; v1@8.3,79.95 8.3,72.95 9.73,71.52 ADC.16@12.333,71.52 12.923,70.93 13.341,70.93 14.483,69.788 14.483,55.472 12.751,53.74 ADC.23@12.333,53.74 ADC.24@12.333,51.2 ADC.25@12.333,48.66 11.598,48.66 10.183,47.245 10.183,45.312 11.325,44.17 11.743,44.17 ADC.27@12.333,43.58 ADC.28@12.333,41.04 12.333,36.333 10.112,34.111 v1(9.362,34.111) ; FPGA_ALIM.2@23,82.46 29.04,82.46 v1@31,80.5 ; C25.1@25.663,38 25.663,39.13 ADC.1@27.573,41.04 ADC.2@27.573,43.58 ADC.3@27.573,46.12 ADC.4@27.573,48.66 ADC.5@27.573,51.2 31.2,51.2 34.55,54.55 34.55,56.7 33,58.25 33,61.75 34.29,63.04 C12.1@35.5,63.04 ; ADC.13@27.573,70.97 ADC.13@27.573,71.52 29.77,71.52 31.25,73 v1@31.25,80.25 ; C12.1@36.25,63.04 C12.1@35.5,63.04 ; v1(38.25,66.25) 38.94,65.56 DAC2.1@38.94,63.14 ; DAC2.2@38.94,60.6 DAC2.1@38.94,63.14 ; v1(46,69.5) 55.66,69.5 R54.1@59.41,65.75 59.66,65.5 R11.1@59.66,63 61.75,63 65.143,59.607 v1(65.143,49.127) ; RP1.1@46.873,31 48,29.873 v1(48,27.5) ; RP1.1@47.25,31 SHCTRLGND.1@47.25,34 ; C11.1@55.29,55.25 59.02,55.25 v1(65.143,49.127) ; v1@61.573,19.177 U1.10@64.123,19.177 ; RP2.1@61.873,93.623 v1@64.877,93.623 ; U1.1@64.123,42.037 64.123,45.337 C26.2@65.143,46.357 65.3,46.514 65.3,48.97 v1(65.143,49.127) ; U1.19@72.263,39.497 U1.19@71.743,39.497 72.333,40.087 72.751,40.087 73.893,41.229 73.893,43.893 v1(74,44) ; v1@76,94.25 76.08,94.33 DZ1.1@85.5,94.33 93,86.83 R8.1@93,84.33 93.1,84.33 93.41,84.64 96.6,84.64 C8.2@97.25,85.29 99.77,87.81 101.19,87.81 103.27,87.81 103.5,87.58 ; v1(80.25,68) 80.25,68.25 81.87,69.87 C20.2@83.25,69.87 83.25,70.5 86.3,73.55 87.179,73.55 89.2,75.571 89.2,76.45 93.53,80.78 94.388,80.78 95.438,81.83 C6.2@102.71,81.83 ; v1(83,45.25) 82.35,44.6 82.35,34.122 84.5,31.972 84.5,30.149 84.75,29.899 84.75,26.5 84.5,26.25 84.5,19.25 84.25,19 R41.1@84.25,17.75 84.25,12 86,10.25 J5.1@89.21,10.25 J5.1@89.21,9.83 ; U6.6@94.25,62.32 U6.6@94.37,62.32 95.04,62.32 C16.2@97.5,59.86 ; v1(95,55.33) 95,57.36 C16.2@97.5,59.86 ; v1(95.75,48.75) 95.75,48.33 98.25,45.83 D14.2@98.25,43 DZ11.2@101.5,43 104.42,43 104.42,42.66 106,41.08 106,38.58 DZ12.1@105.41,37.99 ; v1(96,38.33) 105,38.33 DZ12.1@105.25,38.08 ; R37.2@102.5,37.91 102.5,34.33 104.18,32.65 C17.1@111.71,32.65 ; C7.2@103.5,95.87 103.5,87.58 ; U5.6@111.29,36.9 111.71,36.48 C17.1@111.71,32.65 ; R16.2@114.09,87.08 117.05,84.12 117.05,79.11 R45.2@116.84,78.9 ; C9.2@124.25,70.19 D9.1@124.25,73.15 ; v1(127.99,25.83) 127.59,25.83 D10.1@121.75,31.67 121.35,32.07 120.24,32.07 119.67,31.5 119.67,30.202 117.558,28.09 116.26,28.09 115.75,27.58 115.25,27.58 111.71,31.12 C17.1@111.71,32.65 ; C21.2@130.21,76.65 127.75,76.65 D9.1@124.25,73.15 ; C23.2@131.75,95.37 C22.1@145.75,95.37 ; DZ14.1@132.25,14.75 132.25,12.75 136.25,8.75 153.632,8.75 155.787,10.905 155.885,10.905 157.57,12.59 157.57,12.688 157.7,12.818 157.7,18.25 ; DZ14.1@132.33,14.75 132.33,20.58 133.75,22 v1(133.75,25.83) ; v1@133.42,25.96 135.7,28.24 135.7,32.689 136.901,33.89 141.29,33.89 141.29,33.83 DAC1.2@141.88,34.42 DAC1.1@141.88,36.96 141.84,36.92 C2.1@137.75,36.92 137.08,36.92 133.5,40.5 R56.2@133.5,41 133.5,42.66 134.09,43.25 R5.2@134.09,43.33 ; R5.2@134.09,43 135,43.91 135,49 131.17,52.83 119.899,52.83 117.849,50.78 115.3,50.78 113.25,52.83 C19.2@113.25,54.94 113.21,54.94 R35.1@110.75,57.4 99.96,57.4 C16.2@97.5,59.86 ; C22.1@145.75,95.08 147.67,95.08 149.21,93.54 ; C13.2@149.21,78.5 149.21,93.54 ; C15.2@153.25,69.46 U4.2@158.96,69.46 ; C3.1@157.04,29.33 157.7,28.67 157.7,18.25 ; U4.2@159,69.5 167.25,69.5 168.75,68 ; GNDCMP.1@162.25,55.75 162.25,55.45 168.45,55.45 v1(168.75,55.75) 174.09,55.75 DZ3.1@174.84,56.5 ; TRANSIMP.3@166.27,17.27 TRANSIMP.4@168.81,17.27 ; COMP.4@167.57,50.06 167.57,49.47 166.562,49.47 165.42,48.328 165.42,44.172 167.152,42.44 COMP.1@167.57,42.44 ; v1(168.75,62.5) 168.75,68 ; R28.1@174.67,40.25 174.59,40.17 DZ2.1@174.59,37.25 174.67,37.17 R30.1@174.67,34.25 174.84,34.08 DZ4.1@174.84,31.25 174.92,31.17 R32.1@174.92,27.5 174.84,27.42 DZ6.1@174.84,24.25 174.67,24.08 R34.1@174.67,20.75 174.59,20.67 DZ9.1@174.59,17.75 174.11,17.27 TRANSIMP.4@168.81,17.27 ; R28.1@174.84,40.42 DZ7.1@174.84,43.5 ; R33.1@174.84,47.42 DZ5.1@174.84,50.5 174.84,53.42 R31.1@174.92,53.5 174.92,56.42 DZ3.1@174.84,56.5 ; R33.1@174.92,47 170.36,42.44 COMP.1@167.57,42.44 ; R27.1@175.09,66.08 DZ8.1@175.09,63 174.92,62.83 R29.1@174.92,59.75 174.92,56.58 DZ3.1@174.84,56.5 ; C12.1@35.5,63.04 35.6,63.14 DAC2.1@38.94,63.14 ; C6.2@102.71,81.83 103.5,82.62 103.5,87.58 ; C6.2@102.71,81.83 102.25,81.37 102.25,79.229 102.3,79.179 102.3,77.481 102.25,77.431 102.25,74.75 103.5,73.5 111.382,73.5 116.782,78.9 R45.2@116.84,78.9 ; R45.2@116.84,78.9 122.66,73.08 D9.1@124.08,73.08 124.18,73.08 D9.1@124.25,73.15 ; 149.21,93.54 149.21,93.71 151,95.5 156,95.5 ALIMENTACION.2@159.25,92.25 159.25,88.25 156.75,85.75 U3.2@156.75,82.75 156.75,78.311 158.611,76.45 161.45,76.45 163.25,78.25 166.75,78.25 168.75,76.25 168.75,68 ; 157.7,18.25 158.95,19.5 167.81,19.5 168.81,18.5 ; COMP.1@167.57,42.44 167.57,39.16 C1.2@166.04,37.63 166.04,28.58 C5.2@166.54,28.08 168.81,25.81 TRANSIMP.5@168.81,24.89 168.81,18.5 ; TRANSIMP.4@168.81,17.27 168.81,18.5
  other v1: 31.125,80.5
LATCH_OE: OE.3 R7.2 R8.2 U2.1 | length 139.1
  Top Layer w0.7: v1(17.75,82.75) 17.75,89.75 24,96 v1(29.5,96)
  Bottom Layer w0.7: U2.1@11.19,31.43 13.733,33.973 13.733,38.983 17.7,42.95 v1@17.7,81.95 ; v1(29.5,96) 40.972,96 59,96 59.04,96.04 OE.3@72.5,96.04 74.641,96.04 75.151,96.55 86.69,96.55 R7.2@88.75,94.49 R8.2@93,94.49
NetADC_8: ADC.8 U2.13 | length 53.3
  Top Layer w0.7: v1(23.123,16.5) 23.123,20.123 25,22 25,25.785 24.673,26.112 24.673,31.701 26.122,33.15 26.15,33.15 30.323,37.323 30.323,58.45 v1@30.373,58.5
  Bottom Layer w0.7: U2.13@19.783,13.55 20.201,13.55 23.123,16.472 v1(23.123,16.5) ; ADC.8@27.573,59.41 ADC.8@27.573,58.82 27.643,58.75 v1(30.373,58.75)
NetADC_14: ADC.14 U2.17 | length 56.8
  Bottom Layer w0.7: U2.17@18.81,23.81 18.81,24.4 17.802,24.4 16.66,25.542 16.66,37.307 21.75,42.397 21.75,68.655 26.565,73.47 27.573,73.47 ADC.14@27.573,74.06
NetADC_15: ADC.15 U2.14 | length 75.5
  Top Layer w0.7: v1(12.357,76.75) v1(19.75,76.75)
  Bottom Layer w0.7: ADC.15@12.333,74.06 12.333,76.726 v1(12.357,76.75) ; U2.14@18.81,16.19 17.173,16.19 16.363,17 16.363,21.775 15.25,22.888 15.25,38.5 20.25,43.5 20.25,76.25 20,76.5 v1@20,77
NetADC_17: ADC.17 U2.18 | length 65.8
  Top Layer w0.7: v1(6.5,69) 6.5,55.5 8.243,52.595 v1(9.623,52.25) ; v1(9.5,37.75) 13.4,33.85 19.9,33.85 20.96,32.79 20.96,26.54 v1(21,26.5) 21,31.25
  Bottom Layer w0.7: v1(6.5,69) ADC.17@12.313,69 ; v1(9.5,37.75) 9.5,44.015 8.783,44.732 8.783,51.41 v1(9.623,52.25) ; U2.18@18.81,26.35 20.65,26.35 v1@20.75,26.25
NetADC_18: ADC.18 U2.8 | length 66.3
  Bottom Layer w0.7: U2.8@12.163,13.55 4.95,13.55 2.8,15.7 2.8,59.28 9.37,65.85 11.743,65.85 ADC.18@12.333,66.44
NetADC_19: ADC.19 U2.7 | length 60
  Bottom Layer w0.7: U2.7@12.163,16.09 12.003,16.25 5.5,16.25 4.2,17.55 4.2,58.7 9.4,63.9 ADC.19@12.333,63.9
NetADC_20: ADC.20 U2.4 | length 46.9
  Bottom Layer w0.7: U2.4@11.19,23.81 11.09,23.71 6.79,23.71 5.8,24.7 5.8,57.8 9.36,61.36 ADC.20@12.333,61.36
NetADC_21: ADC.21 U2.3 | length 40
  Bottom Layer w0.7: U2.3@11.09,26.25 8,26.25 7.2,27.05 7.2,56.95 9.07,58.82 ADC.21@12.333,58.82